# Altium PCB EMG_PCB.PcbDoc
Units mm, origin at the board's own origin, x right, y up, seen from the top; angles counter-clockwise.
Board outline 54.32 x 31.62 mm, 2 copper layers (Top Layer, Bottom Layer); 7 components, 28 nets, 68 pads, 4 vias.
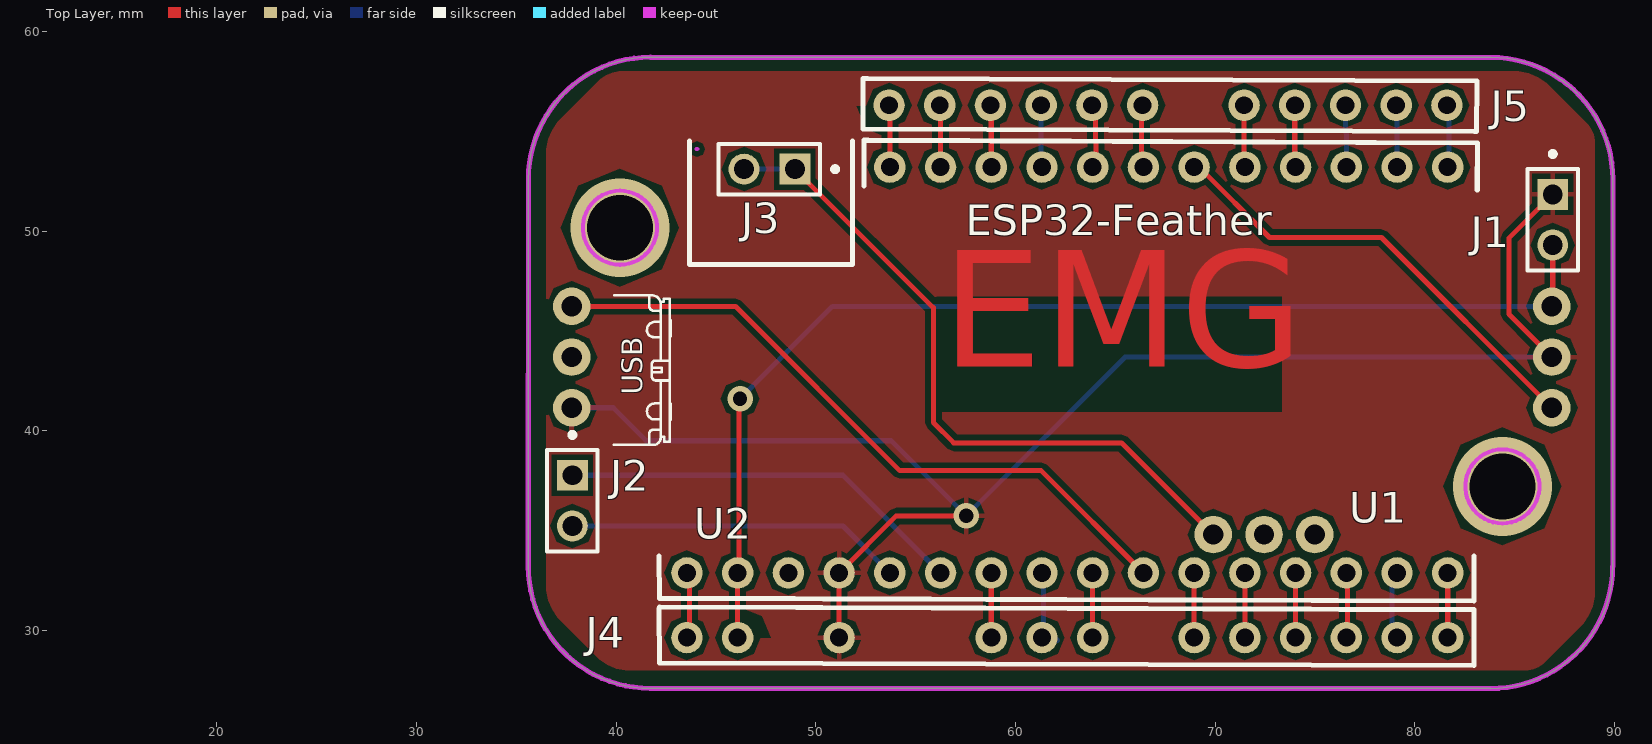
[diagram p0: Top Layer view]
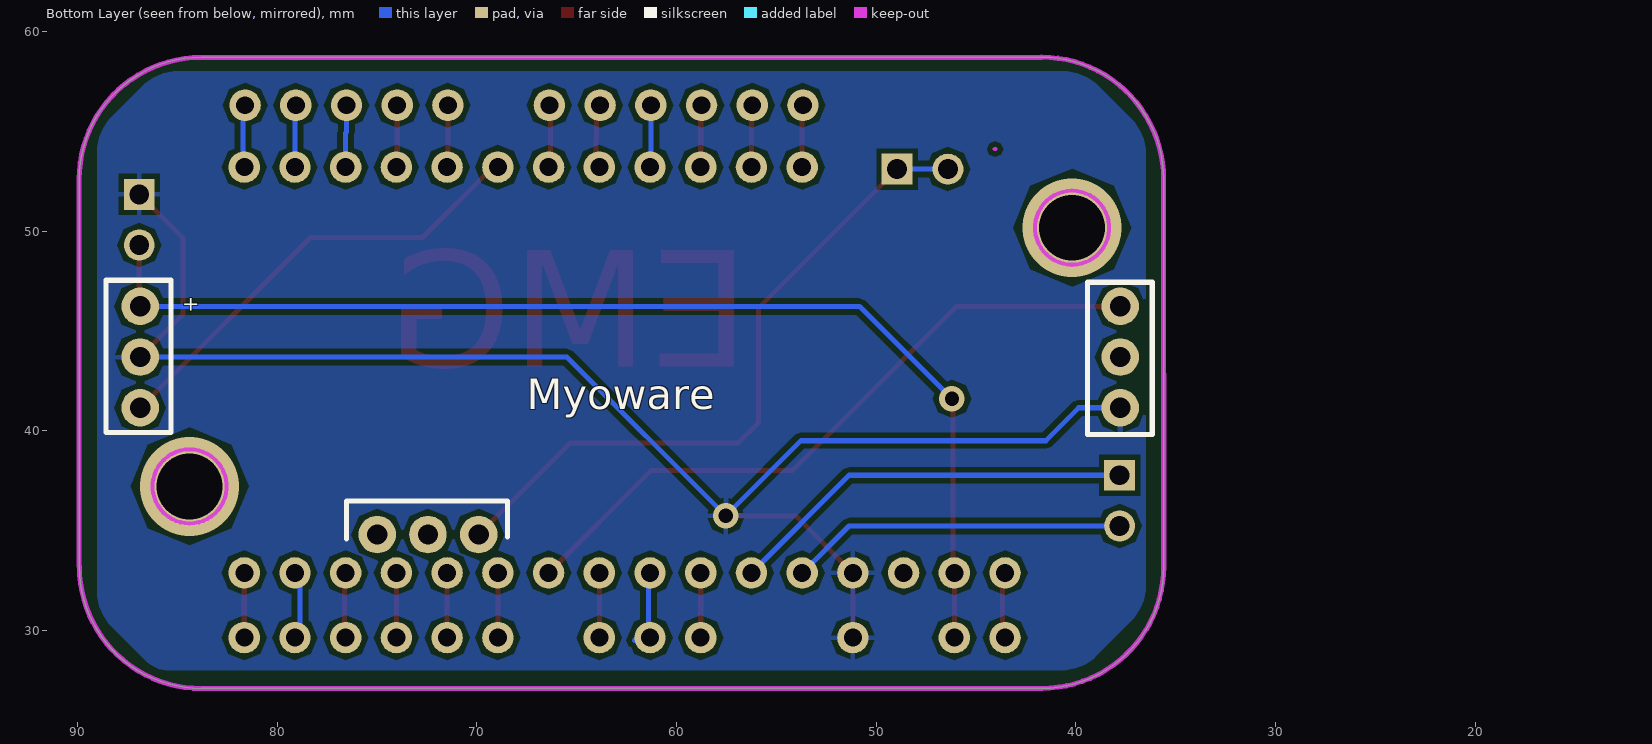
[diagram p1: Bottom Layer view, seen from below]

## Layer stack, top to bottom
Top Solder: solder mask 0.0102, Solder Resist, Dk 3.5
Top Layer: signal copper 0.0356
Dielectric 1: dielectric 0.32, FR-4, Dk 4.8
Bottom Layer: signal copper 0.0356
Bottom Solder: solder mask 0.0102, Solder Resist, Dk 3.5

## Board outline
35.591,33.209 ccw(c41.7,33.209) 41.7,27.1 83.791,27.1 83.791,27.091 ccw(c83.791,33.2) 89.9,33.2 89.909,33.2 89.909,52.591 ccw(c83.8,52.591) 83.8,58.7 41.709,58.7 41.709,58.709 ccw(c41.709,52.6) 35.6,52.6

## Design rules (kind name [scope] priority, off if disabled: settings)
Clearance [All] p1: gap=0.254 ignorepadtopadclearanceinfootprint=FALSE except(0: Arc-Hole Track-Hole SMDPad-Hole THPad-Hole Via-Hole Fill-Hole Poly-Hole Region-Hole Text-Hole)
PolygonConnect [All] p1: connectstyle=Relief reliefconductorwidth=0.254 reliefentries=4 polygonreliefangle="90 Angle" airgapwidth=0.254
RoutingVias [All] p1: holewidth=0.711 width=1.27 viastyle="Through Hole" minholewidth=0.711 minwidth=1.27 maxholewidth=0.711 maxwidth=1.27
SolderMaskExpansion [All] p1: expansion=0.102
Width [All] p1: maxlimit=0.254 minlimit=0.254 preferedwidth=0.254
30 further rules are at their usual default settings.

## Components (designator, comment, footprint, x,y, rotation, side; value= is the part's Value field where it differs from the comment)
J1 "Conn_Molex_90120-0762_eec" Molex_90120-0762_0 86.9,50.57 r270 top
J2 "Conn_Molex_90120-0762_eec" Molex_90120-0762_0 37.8,36.5 r270 top
J3 "Conn_Molex_90120-0762_eec" Molex_90120-0762_0 47.67,53.1 r180 top
J4 "Conector_1-16" PCBComponent_1#1 60.329,27.149 r0 top
J5 "conector_17-28" PCBComponent_1#2 65.776,53.201 r0 top
U1 "ESP-32 feather 28 pines" ESP32-FEATHER-FOOTPRINT_V3 62.234,43.37 r0 top
U2 "Myoware" MYOWARE_FOOTPRINT_V4 62.661,44.643 r0 top

## Footprints (in the part's own frame and the unit in brackets; to place one, negate y for a bottom-side part, rotate by r counter-clockwise, add the part's x,y. Pads: shape width x height; smd on the part's side, far side on the other; paste and mask are expansions set on the pad)
ESP32-FEATHER-FOOTPRINT_V3 [mil]
  round 62 / inner round 60 / far side round 62 hole 35.43: 1(-736,-413) 2(-636,-413) 3(-536,-413) 4(-436,-413) 5(-336,-413) 6(-236,-413) 7(-136,-413) 8(-36,-413) 9(64,-413) 10(164,-413) 11(264,-413) 12(364,-413) 13(464,-413) 14(564,-413) 15(664,-413) 16(764,-413) 17(764,387) 18(664,387) 19(564,387) 20(464,387) 21(364,387) 22(264,387) 23(164,387) 24(64,387) 25(-36,387) 26(-136,387) 27(-236,387) 28(-336,387)
  Top Layer lines w10: -736,-413 -731,-413 ; -241,362 -236,367 -236,385.35 -236,387 ; 64,387 70.85,380.15 ; 164,387 170.85,380.15 ; 264,387 274,387
  Bottom Layer lines w10: -36,-413 -11,-413 ; -36,382 -36,387 ; 539,-413 564,-413 ; 564,381 564,387 ; 654,-403 664,-413 ; 664,387 679,372 ; 759,392 764,387
  silkscreen extent -880,-468 823,440
Molex_90120-0762_0 [mm]
  rect 1.55x1.55 hole 1 paste-1000 mask+0: 1(-1.27,0)
  round 1.55 hole 1 paste-1000 mask+0: 2(1.27,0)
  silkscreen extent -3.41,-1.27 2.54,1.27, body extent -2.54,-1.27 2.54,1.23, height 9.25
MYOWARE_FOOTPRINT_V4 [mil]
  round 74 / inner round 60 / far side round 74 hole 40: 1(952.5,62.5) 2(952.5,-37.5) 3(952.5,-137.5) 4(285,-387.5) 5(385,-387.5) 6(485,-387.5) 7(-980,62.5) 8(-980,-37.5) 9(-980,-137.5)
  round 130 hole 130 unplated: MH1(-885,217.5) MH1(855,-292.5)
  Top Layer keep-out lines w8: -885,144.5 cw(c-885,217.5) -885,290.5 cw(c-885,217.5) -885,144.5 ; 855,-365.5 cw(c855,-292.5) 855,-219.5 cw(c855,-292.5) 855,-365.5
  Bottom Layer keep-out lines w8: -885,144.5 cw(c-885,217.5) -885,290.5 cw(c-885,217.5) -885,144.5 ; 855,-365.5 cw(c855,-292.5) 855,-219.5 cw(c855,-292.5) 855,-365.5
  Keep-Out Layer lines w8: -733.75,372.5 -732.5,372.5
PCBComponent_1#1 [mil]
  round 62 / inner round 60 / far side round 62 hole 35.43: 1(-661,98) 2(-561,98) 4(-361,98) 7(-61,98) 8(39,98) 9(139,98) 11(339,98) 12(439,98) 13(539,98) 14(639,98) 15(739,98) 16(839,98)
  Top Layer lines w10: -661,98 -656,98
  Bottom Layer lines w10: 39,98 64,98 ; 614,98 636.13,98 639,98 ; 729,108 739,98
  silkscreen extent -716,43 891,158
PCBComponent_1#2 [mil]
  round 62 / inner round 60 / far side round 62 hole 35.43: 17(623,122) 18(523,122) 19(423,122) 20(323,122) 21(223,122) 23(23,122) 24(-77,122) 25(-177,122) 26(-277,122) 27(-377,122) 28(-477,122)
  Top Layer lines w10: -382,97 -377,102 -377,122 ; -77,122 -70.15,115.15 ; 23,122 29.85,115.15
  Bottom Layer lines w10: -177,117 -177,122 ; 423,116 423,122 ; 523,122 538,107 ; 618,127 623,122
  silkscreen extent -528,70 682,175

## Part data
J1 J2 J3: "CONN HEADER 2POS .100\" STR GOLD", Digikey Part Number=WM8084-ND, Manufacturer=Molex, Mouser Part Number=538-90120-0762, Package=CONN_PTH_HDR2, Part Number=90120-0762, Temperature="-55°C to +125°C", Temperature Range High=+125°C, Temperature Range Low=-55°C, ComponentLink1Description=Upverter, ComponentLink1URL=https://upverter.com/upn/revision/2e8a16f42ccfe3ab/, ComponentLink2Description=Datasheet, ComponentLink2URL=http://www.molex.com/pdm_docs/sd/901200761_sd.pdf, Digikey Description="CONN HEADER 2POS .100\" STR GOLD", helpURL=https://upverter.com/upn/revision/2e8a16f42ccfe3ab/, Lead Free=yes, RoHS=TRUE, Supplier 1=Digi-Key, Supplier 2=Mouser, Supplier Part Number 1=WM8084-ND, Supplier Part Number 2=538-90120-0762
U1: library part ESP32-Feather

## Via types
v1: diameter 4.953/4.953 (per signal layer), hole 3.302, Top Layer to Bottom Layer, 2 vias
v2: diameter 1.27, hole 0.711, Top Layer to Bottom Layer, 2 vias

## Nets (pads, with @x,y where several pads share a name; then routed paths per layer and width w, separated by ;. In a path a pad name is that pad's centre, name@x,y a point inside that pad or via, vN(x,y) a via of type N, cw(c..) or ccw(c..) an arc to the next point about the centre after c; other vN are vias at no path point)
7: J4.7 U1.7 | length 3.4
  Top Layer w0.254: U1.7 J4.7 J4.7@58.918,29.5
8: J4.8 U1.8 | length 3.9
  Bottom Layer w0.254: U1.8@61.955,32.88 61.4,32.325 61.4,30.193 61.775,29.818 J4.8@62.093,29.5
9: J4.9 U1.9 | length 3.4
  Top Layer w0.254: U1.9 J4.9 J4.9@63.998,29.5
11: J4.11 U1.11 | length 3.4
  Top Layer w0.254: U1.11 J4.11 J4.11@69.078,29.5
12: J4.12 U1.12 | length 3.4
  Top Layer w0.254: U1.12 J4.12 J4.12@71.618,29.5
13: J4.13 U1.13 | length 3.4
  Top Layer w0.254: U1.13 J4.13 J4.13@74.158,29.5
14: J4.14 U1.14 | length 4.1
  Top Layer w0.254: J4.14@76.625,29.5 U1.14@76.625,32.78
  Bottom Layer w0.254: J4.14@76.063,29.5 76.387,29.185 76.625,29.426 J4.14@76.625,29.5
15: J4.15 U1.15 | length 3.2
  Bottom Layer w0.254: J4.15@78.846,29.892 U1.15@78.846,33.134
16: J4.16 U1.16 | length 3.4
  Top Layer w0.254: U1.16 J4.16 J4.16@81.778,29.5
17: J5.17 U1.17 | length 3.3
  Bottom Layer w0.254: J5.17@81.473,56.427 J5.17 81.7,56.2 81.7,53.514 U1.17@81.513,53.327
18: J5.18 U1.18 | length 3.4
  Bottom Layer w0.254: J5.18@79.441,55.919 79.1,55.578 U1.18 U1.18@79.481,52.819
19: J5.19 U1.19 | length 3.1
  Bottom Layer w0.254: J5.19@76.52,56.148 76.52,54.958 76.56,54.918 U1.19 U1.19@76.56,53.048
20: J5.20 U1.20 | length 3.1
  Top Layer w0.254: J5.20 73.98,53.24 U1.20
21: J5.21 U1.21 | length 3.1
  Top Layer w0.254: J5.21 71.44,53.24 U1.21
23: J5.23 U1.23 | length 3.3
  Top Layer w0.254: J5.23@66.534,56.126 66.3,55.892 66.3,53.3 U1.23 U1.23@66.574,53.026
24: J5.24 U1.24 | length 3.1
  Top Layer w0.254: J5.24@63.994,56.126 63.994,54.589 64.034,54.549 U1.24@64.034,53.026
25: J5.25 U1.25 | length 3.1
  Bottom Layer w0.254: J5.25@61.28,56.173 61.28,53.113 U1.25@61.32,53.073
26: J5.26 U1.26 | length 3.1
  Top Layer w0.254: J5.26 58.78,56.26 U1.26
27: J5.27 U1.27 | length 3.7
  Top Layer w0.254: U1.27@56.113,52.565 55.88,52.798 56.24,53.158 U1.27 J5.27@56.24,56.046
28: J5.28 U1.28 | length 3.1
  Top Layer w0.254: J5.28 cw(c53.66,56.26) 53.7,56.26 U1.28
GND: J1.1 J4.4 U1.4 U2.2 U2.9 | length 75.6
  Top Layer w0.254: J4.4@51.298,29.5 J4.4 U1.4 54.018,35.738 v2(57.531,35.738) ; U2.2 84.7,45.844 84.7,49.64 J1.1
  Bottom Layer w0.254: U2.9 39.85,41.15 41.5,39.5 53.769,39.5 v2(57.531,35.738) 65.483,43.69 U2.2
MO2: J2.1 U1.6 | length 20.5
  Bottom Layer w0.254: J2.1 51.35,37.77 U1.6
MO3: J2.2 U1.5 | length 16.9
  Bottom Layer w0.254: J2.2 51.35,35.23 U1.5
R: J3.1 J3.2 U2.4 | length 34.4
  Top Layer w0.254: J3.1 55.88,46.16 55.88,40.411 56.896,39.395 65.305,39.395 U2.4
  Bottom Layer w0.254: J3.2 J3.1
RAW: U1.10 U2.7 | length 34.2
  Top Layer w0.254: U2.7 45.97,46.23 54.2,38 61.28,38 U1.10
RST: J4.1 U1.1 | length 3.4
  Top Layer w0.254: U1.1@43.667,32.88 43.667,29.638 J4.1@43.805,29.5
SIG: U1.22 U2.3 | length 22.7
  Top Layer w0.254: U1.22@69.194,53.2 72.712,49.682 78.322,49.682 U2.3
VCC: J1.2 J4.2 U1.2 U2.1 | length 57.9
  Top Layer w0.254: v2(46.2,41.6) 46.14,41.54 46.14,32.94 U1.2 J4.2 ccw(c46.218,29.638) J4.2@46.218,29.5 ; U2.1 86.9,46.275 J1.2
  Bottom Layer w0.254: v2(46.2,41.6) 50.83,46.23 U2.1
pads on no net: U1.3 U2.5 U2.6 U2.8 U2.MH1
copper on no net:
  other v1: 84.378,37.213 40.182,50.167

## Polygon pours and split planes (outlines as drawn)
GND on Bottom Layer (solid, pour order 36): 85.393,28 ccw(c85.393,29.707) 86.6,28.5 88.256,30.156 ccw(c86.46,31.952) 89,31.952 89,53.948 ccw(c86.46,53.948) 88.256,55.744 86.744,57.256 ccw(c84.948,55.46) 84.948,58 40.652,58 ccw(c40.652,55.46) 38.856,57.256 37.244,55.644 ccw(c39.04,53.848) 36.5,53.848 36.5,32.252 ccw(c39.04,32.252) 37.244,30.456 38.956,28.744 ccw(c40.752,30.54) 40.752,28
no net on Bottom Layer (solid, pour order 30): 65.5,28
no net on Bottom Layer (solid, pour order 28): 78.6,28
no net on Bottom Layer (solid, pour order 26): 83,28
no net on Bottom Layer (solid, pour order 24): 28.8,34
no net on Bottom Layer (solid, pour order 20): 29.6,35.4
no net on Bottom Layer (solid, pour order 16): 36.4,33.5
no net on Bottom Layer (solid, pour order 6): 36.5,53
no net on Bottom Layer (solid, pour order 4): 36.5,34
GND on Top Layer (solid, pour order 38): 85.534,28 ccw(c85.534,29.366) 86.5,28.4 88.256,30.156 ccw(c86.46,31.952) 89,31.952 89,54.4 ccw(c87.551,54.4) 88.576,55.424 86.744,57.256 ccw(c84.948,55.46) 84.948,58 40.3,58 ccw(c40.3,56.31) 39.105,57.505 37.244,55.644 ccw(c39.04,53.848) 36.5,53.848 36.5,32.252 ccw(c39.04,32.252) 37.244,30.456 39,28.7 ccw(c40.69,30.39) 40.69,28

## Keep-outs
Keep-Out Layer:
  lines w0.254: 41.7,27.1 cw(c41.7,33.209) 35.591,33.209 35.6,52.6 cw(c41.709,52.6) 41.709,58.709 41.709,58.7 83.8,58.7 cw(c83.8,52.591) 89.909,52.591 89.909,33.2 89.9,33.2 cw(c83.791,33.2) 83.791,27.091 83.791,27.1 41.7,27.1 ; 41.7,27.1 41.7,27.1

## Other copper
Top Layer:
  region: 13.1,47.5
  text "EMG" at 56.3,41.3 h10
Bottom Layer:
  region: 27.4,58.7

## Text inside footprints (layer, text, board x,y; h text height)
U1: Top Overlay "USB" at 41.305,41.795 h1.02 r90; Top Overlay "ESP32-Feather" at 57.5,49.8 h1.52
U2: Bottom Overlay "+" at 83.87,46.014 h0.76